# Altium PCB V1.1.PcbDoc
Units mil, origin at the board's own origin, x right, y up, seen from the top; angles counter-clockwise.
Board outline 29635 x 12600 mil, 2 copper layers (Top Layer, Bottom Layer); 166 components, 136 nets, 533 pads, 15 vias.
Unrouted connection lines stored in the file: 302.
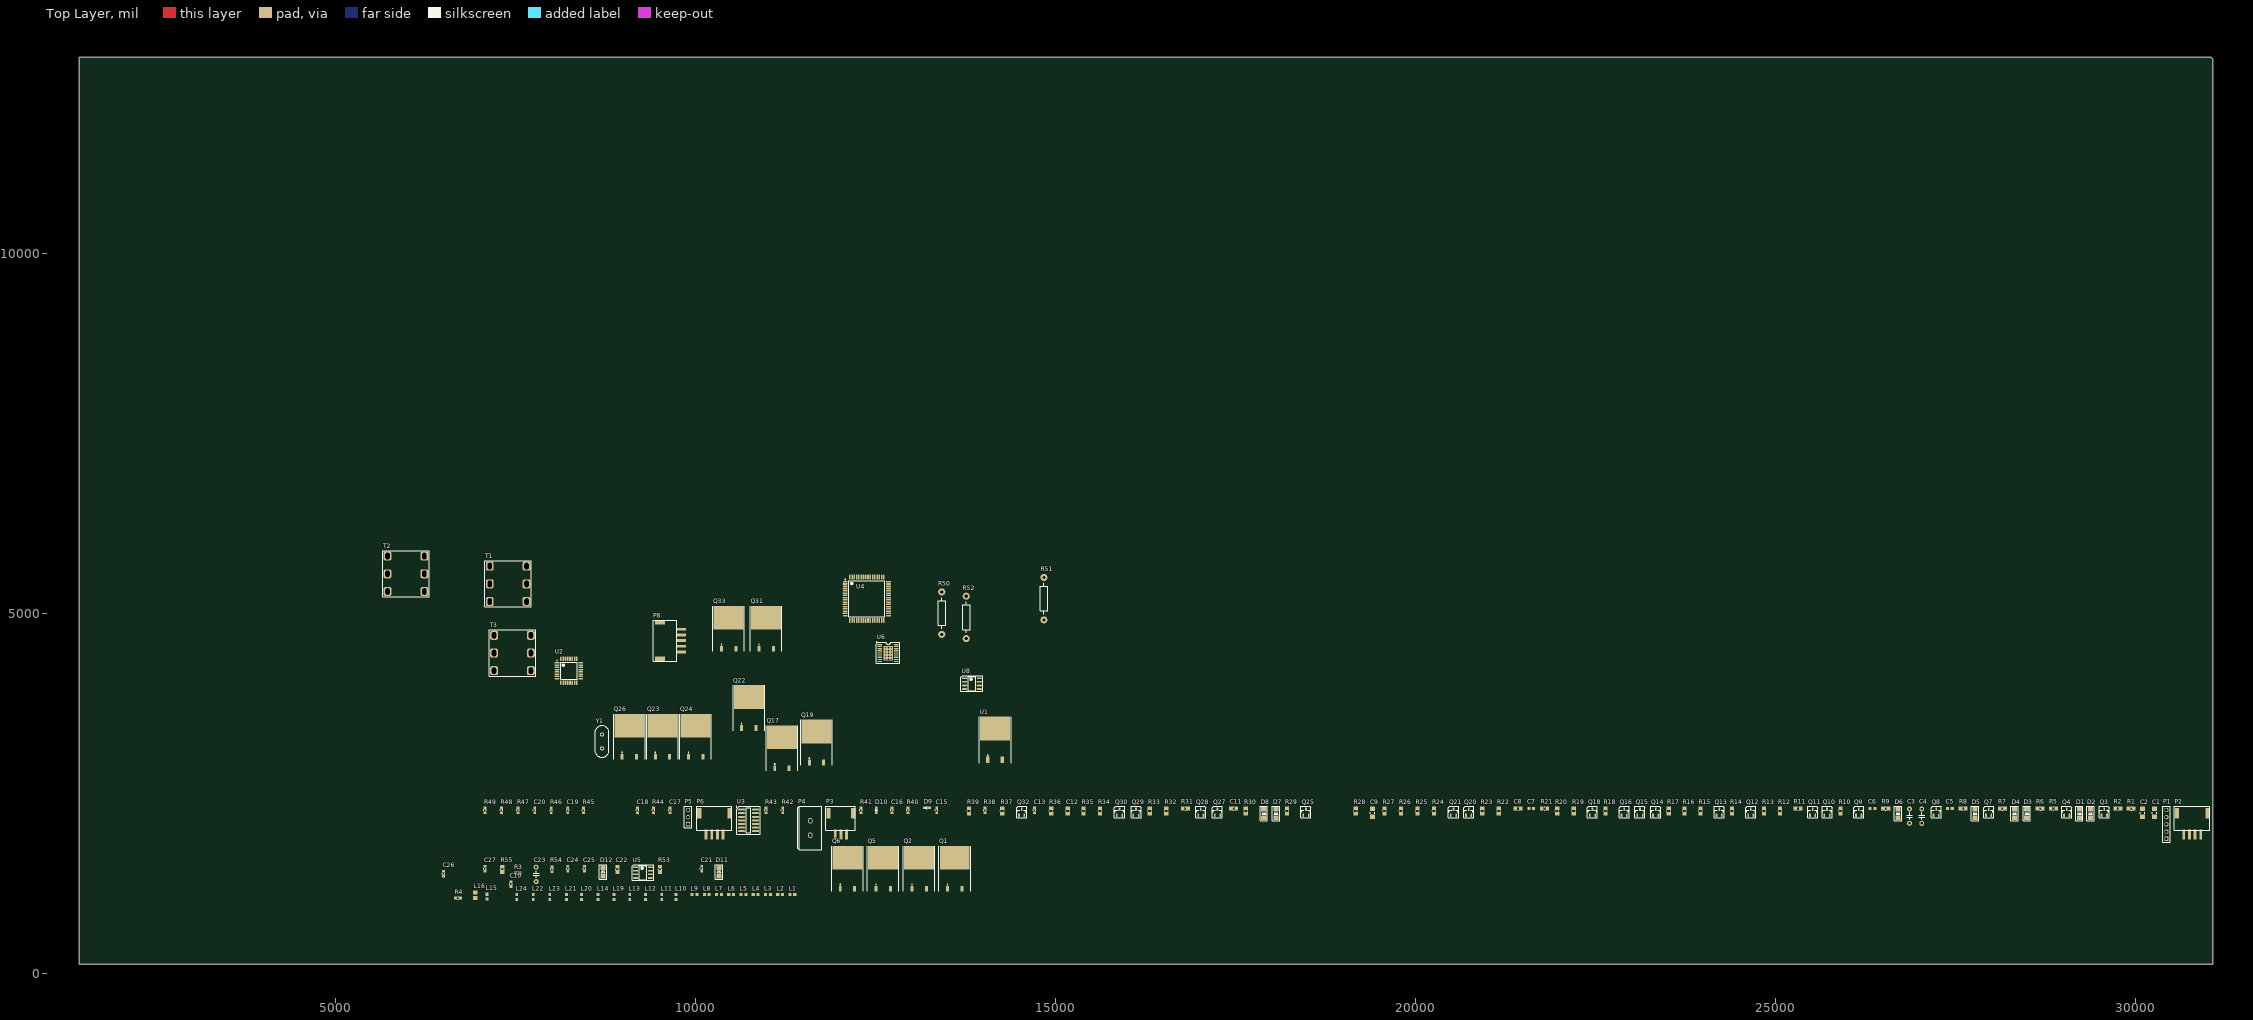
[diagram p0: Top Layer view]
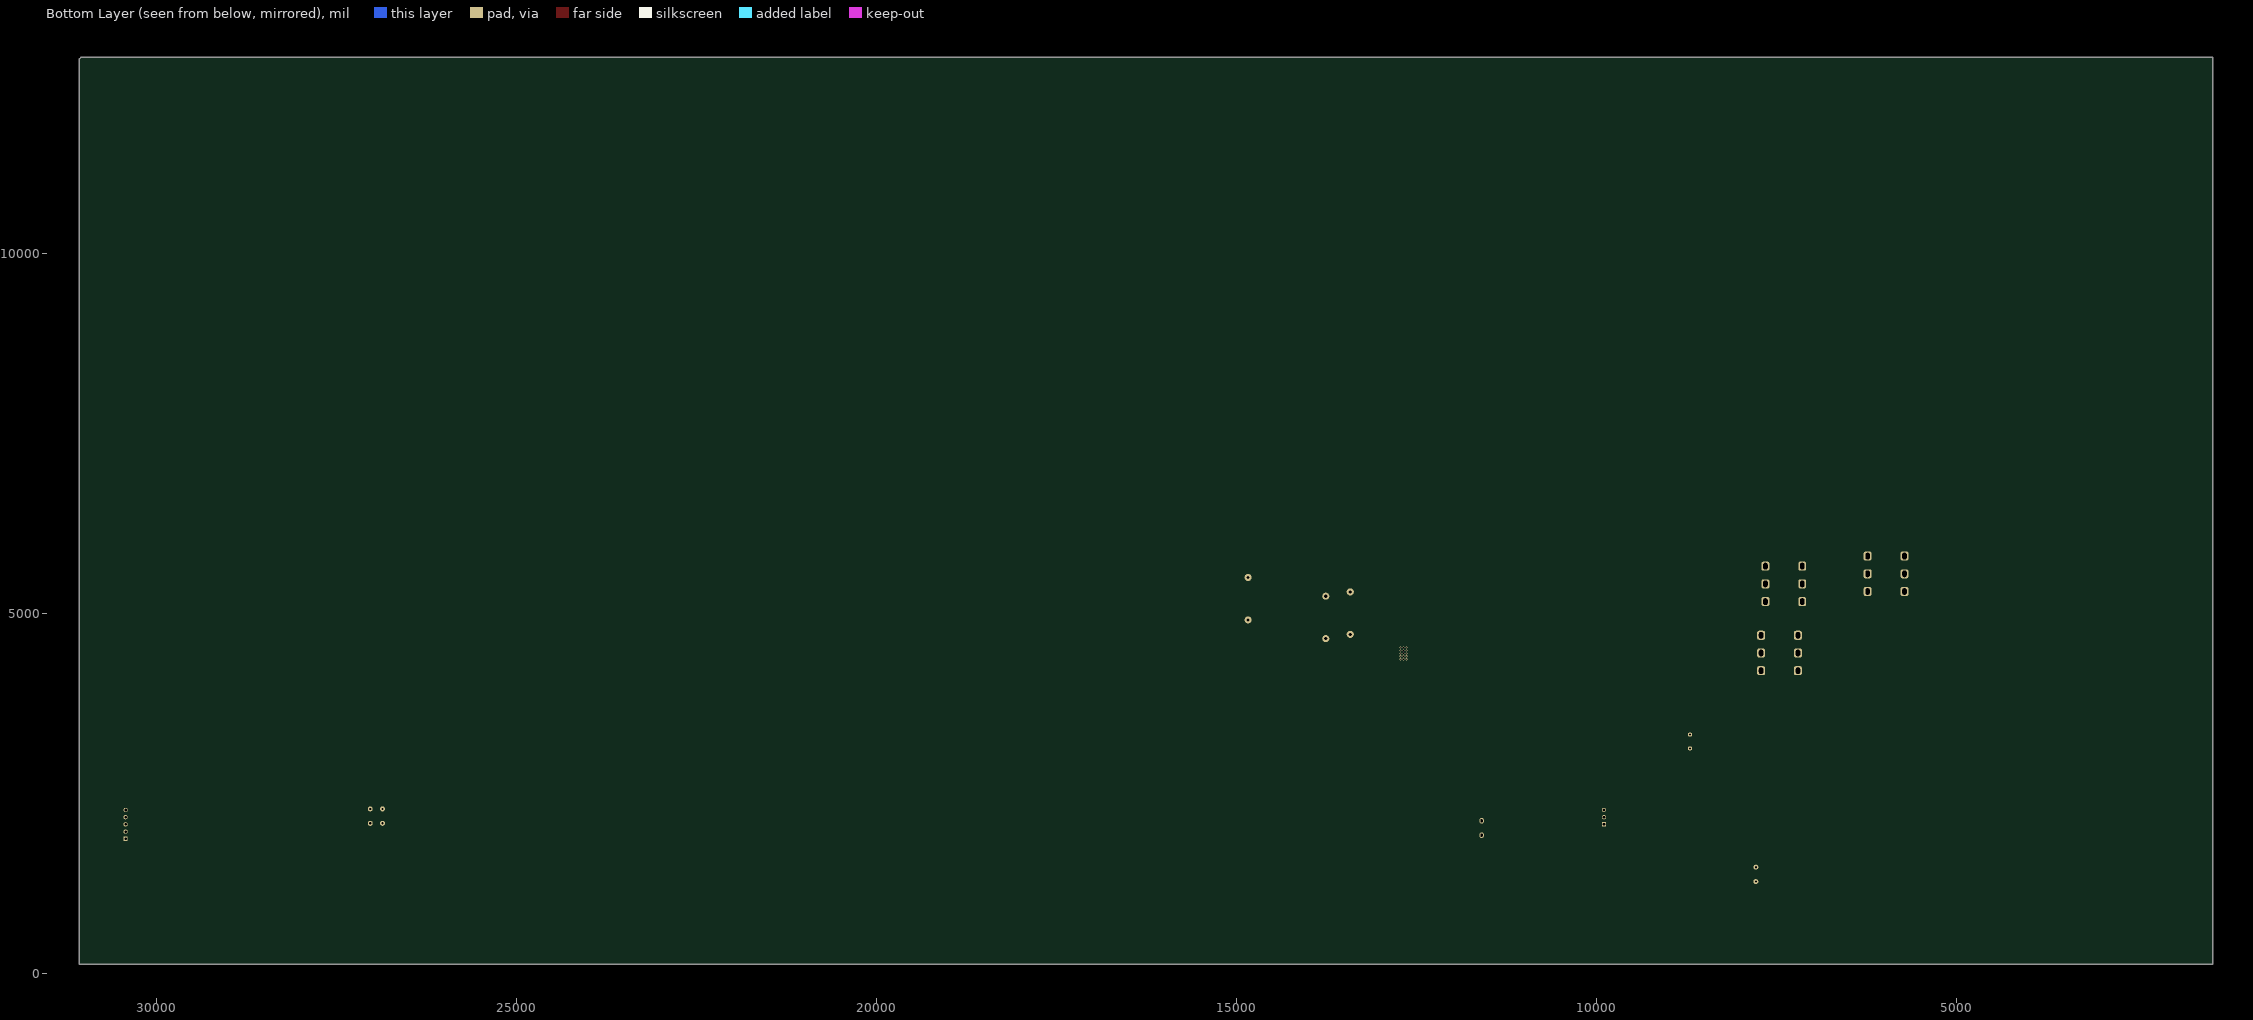
[diagram p1: Bottom Layer view, seen from below]

## Layer stack, top to bottom
Top Layer: signal copper 1.4
Dielectric: dielectric 12.6, FR-4, Dk 4.8
Bottom Layer: signal copper 1.4

## Board outline
1440,12720 31055,12720 31075,12700 31075,120 1440,120

## Design rules (kind name [scope] priority, off if disabled: settings)
Clearance [All] p1: gap=10
ComponentClearance [All] p1: gap=10 collisioncheckmode=3 verticalgap=10
PolygonConnect [All] p1: connectstyle=Relief reliefconductorwidth=10 reliefentries=4 polygonreliefangle="90 Angle"
RoutingVias [All] p1: holewidth=28 width=50 viastyle="Through Hole" minholewidth=28 minwidth=50 maxholewidth=28 maxwidth=50
SolderMaskExpansion [All] p1: expansion=4
TestPointUsage [All] p1: valid=0 allowmultiple=FALSE
Testpoint [All] p1: side=15 testpointundercomponent=TRUE minsize=40 maxsize=100 preferedsize=60 minholesize=0 maxholesize=40 preferedholesize=32 testpointgrid=1 style=1023 order=0123456789
Width [All] p1: maxlimit=10 minlimit=10 preferedwidth=10
18 further rules are at their usual default settings.

## Classes and differential pairs
component class core: L1 L2 L3 L4 L5 L6 L7 L8 L9 L10 L11 L12 L13 L14 L15 L16 L19 L20 L21 L22 L23 L24
component class driver: C1 C2 C3 C4 C5 C6 C7 C8 C9 C10 C11 C12 C13 C15 C16 C17 C18 C19 C20 D1 D2 D3 D4 D5 D6 D7 D8 D9 D10 P1 P2 P3 P4 P5 P6 P8 Q1 Q2 Q3 Q4 Q5 Q6 Q7 Q8 Q9 Q10 Q11 Q12 Q13 Q14 Q15 Q16 Q17 Q18 Q19 Q20 Q21 Q22 Q23 Q24 Q25 Q26 Q27 Q28 Q29 Q30 Q31 Q32 Q33 R1 R2 R3 R4 R5 R6 R7 R8 R9 R10 R11 R12 R13 R14 R15 R16 R17 R18 R19 R20 R21 R22 R23 R24 R25 R26 R27 R28 R29 R30 R31 R32 R33 R34 R35 R36 R37 R38 R39 R40 R41 R42 R43 R44 R45 R46 R47 R48 R49 T1 T2 T3 U2 U3 U8 Y1
component class power: C21 C22 C23 C24 C25 C26 C27 D11 D12 R50 R51 R52 R53 R54 R55 U1 U4 U5 U6

## Components (designator, comment, footprint, x,y, rotation, side; value= is the part's Value field where it differs from the comment)
C1 "Cap" 3216[1206] 30270,2225 r90 top
C2 "Cap" 3216[1206] 30100,2225 r90 top
C3 "Cap" C-5.08 26865,2080 r90 top
C4 "Cap" C-5.08 27035,2080 r90 top
C5 "Cap" 1608[0603] 27425,2285 r0 top
C6 "Cap" 1608[0603] 26350,2285 r0 top
C7 "Cap" 1608[0603] 21610,2285 r0 top
C8 "Cap" R0805 21425,2285 r0 top
C9 "Cap" 3216[1206] 19405,2225 r90 top
C10 "Cap" 0603 7435,1235 r90 top
C11 "Cap" R0805 17475,2285 r0 top
C12 "Cap" R0805 15170,2250 r90 top
C13 "Cap" 0603 14710,2260 r90 top
C15 "Cap" 0603 13350,2260 r90 top
C16 "Cap" 0603 12730,2260 r90 top
C17 "Cap" 0603 9645,2260 r90 top
C18 "Cap" 0603 9195,2260 r90 top
C19 "Cap" 0603 8225,2260 r90 top
C20 "Cap" 0603 7765,2260 r90 top
C21 "Cap" 0603 10085,1450 r90 top
C22 "Cap" R0805 8915,1440 r90 top
C23 "Cap" C-5.08 7785,1270 r90 top
C24 "Cap" 0603 8225,1450 r90 top
C25 "Cap" 0603 8455,1450 r90 top
C26 "Cap" 0603 6500,1380 r90 top
C27 "Cap" 0603 7075,1450 r90 top
D1 "Diode" LL34 29225,2215 r90 top
D2 "Diode" LL34 29380,2215 r90 top
D3 "Diode" LL34 28495,2215 r90 top
D4 "Diode" LL34 28325,2215 r90 top
D5 "Zener diode" LL34 27775,2215 r90 top
D6 "Zener diode" LL34 26705,2215 r90 top
D7 "Diode" LL34 18065,2215 r90 top
D8 "Zener diode" LL34 17895,2215 r90 top
D9 "WORK" 0603-LED 13215,2295 r0 top
D10 "FALT" 0603-LED 12510,2260 r90 top
D11 "4148" LL34 10325,1405 r90 top
D12 "4148" LL34 8715,1405 r90 top
L1 "Inductor" 1608[0603] 11345,1090 r0 top
L2 "Inductor" 1608[0603] 11175,1090 r0 top
L3 "Inductor" 1608[0603] 11005,1090 r0 top
L4 "Inductor" 1608[0603] 10835,1090 r0 top
L5 "Inductor" 1608[0603] 10665,1090 r0 top
L6 "Inductor" 1608[0603] 10495,1090 r0 top
L7 "Inductor" 1608[0603] 10325,1090 r0 top
L8 "Inductor" 1608[0603] 10155,1090 r0 top
L9 "Inductor" 1608[0603] 9985,1090 r0 top
L10 "Inductor" 1608[0603] 9730,1055 r90 top
L11 "Inductor" 1608[0603] 9530,1055 r90 top
L12 "Inductor" 1608[0603] 9305,1055 r90 top
L13 "Inductor" 1608[0603] 9085,1055 r90 top
L14 "Inductor" 1608[0603] 8645,1055 r90 top
L15 "Inductor" 1608[0603] 7100,1060 r90 top
L16 "Inductor" 2012[0805] 6940,1080 r90 top
L19 "Inductor" 1608[0603] 8865,1055 r90 top
L20 "Inductor" 1608[0603] 8415,1055 r90 top
L21 "Inductor" 1608[0603] 8205,1055 r90 top
L22 "Inductor" 1608[0603] 7745,1055 r90 top
L23 "Inductor" 1608[0603] 7975,1055 r90 top
L24 "Inductor" 1608[0603] 7515,1055 r90 top
P1 "PROG" HDR1X5 30435,1865 r90 top
P2 "ENC" HY2.0-4P 30675,1925 r0 top
P3 "IIC" HY2.0-3P 11940,1925 r0 top
P4 "POW" KF127-5.08-2P 11595,1915 r90 top
P5 "TTL" HDR1X3 9895,2065 r90 top
P6 "CTL" HY2.0-4P 10145,1925 r0 top
P8 "HALL" HY2.0-5P 9800,4460 r90 top
Q1 "CSD19536" D2PAK#1 13600,1385 r0 top
Q2 "CSD19536" D2PAK#1 13105,1385 r0 top
Q3 "PNP" SOT-23-PNP 29570,2235 r0 top
Q4 "PNP" SOT-23-PNP 29050,2235 r0 top
Q5 "CSD19536" D2PAK#1 12605,1385 r0 top
Q6 "CSD19536" D2PAK#1 12110,1385 r0 top
Q7 "NPN" SOT-23-NPN 27965,2235 r0 top
Q8 "NPN" SOT-23-NPN 27235,2235 r0 top
Q9 "NPN" SOT-23-NPN 26160,2235 r0 top
Q10 "PNP" SOT-23-PNP 25720,2235 r0 top
Q11 "PNP" SOT-23-PNP 25520,2235 r0 top
Q12 "NPN" SOT-23-NPN 24660,2235 r0 top
Q13 "PNP" SOT-23-PNP 24220,2235 r0 top
Q14 "PNP" SOT-23-PNP 23340,2235 r0 top
Q15 "PNP" SOT-23-PNP 23120,2235 r0 top
Q16 "NPN" SOT-23-NPN 22900,2235 r0 top
Q17 "CSD19536" D2PAK#1 11200,3060 r0 top
Q18 "NPN" SOT-23-NPN 22460,2235 r0 top
Q19 "CSD19536" D2PAK#1 11680,3140 r0 top
Q20 "NPN" SOT-23-NPN 20740,2235 r0 top
Q21 "NPN" SOT-23-NPN 20530,2235 r0 top
Q22 "CSD19536" D2PAK#1 10740,3620 r0 top
Q23 "CSD19536" D2PAK#1 9540,3220 r0 top
Q24 "CSD19536" D2PAK#1 10000,3220 r0 top
Q25 "PNP" SOT-23-PNP 18480,2235 r0 top
Q26 "CSD19536" D2PAK#1 9080,3220 r0 top
Q27 "NPN" SOT-23-NPN 17250,2235 r0 top
Q28 "PNP" SOT-23-PNP 17020,2235 r0 top
Q29 "PNP" SOT-23-PNP 16120,2235 r0 top
Q30 "NPN" SOT-23-NPN 15890,2235 r0 top
Q31 "CSD19536" D2PAK#1 10980,4720 r0 top
Q32 "NPN" SOT-23-NPN 14530,2235 r0 top
Q33 "CSD19536" D2PAK#1 10460,4720 r0 top
R1 "Res1" R0805 29945,2285 r0 top
R2 "Res1" R0805 29760,2285 r0 top
R3 "Res1" 0603 7530,1390 r0 top
R4 "Res1" 0603 6700,1040 r0 top
R5 "Res1" R0805 28865,2285 r0 top
R6 "Res1" R0805 28680,2285 r0 top
R7 "Res1" R0805 28155,2285 r0 top
R8 "Res1" R0805 27610,2285 r0 top
R9 "Res1" R0805 26535,2285 r0 top
R10 "Res1" R0805 25905,2250 r90 top
R11 "Res1" R0805 25315,2285 r0 top
R12 "Res1" R0805 25065,2250 r90 top
R13 "Res1" R0805 24845,2250 r90 top
R14 "Res1" R0805 24400,2250 r90 top
R15 "Res1" R0805 23960,2250 r90 top
R16 "Res1" R0805 23740,2250 r90 top
R17 "Res1" R0805 23520,2250 r90 top
R18 "Res1" R0805 22640,2250 r90 top
R19 "Res1" R0805 22200,2250 r90 top
R20 "Res1" R0805 21970,2250 r90 top
R21 "Res1" R0805 21795,2285 r0 top
R22 "Res1" R0805 21160,2250 r90 top
R23 "Res1" R0805 20930,2250 r90 top
R24 "Res1" R0805 20260,2250 r90 top
R25 "Res1" R0805 20030,2250 r90 top
R26 "Res1" R0805 19800,2250 r90 top
R27 "Res1" R0805 19570,2250 r90 top
R28 "Res1" R0805 19170,2250 r90 top
R29 "Res1" R0805 18215,2250 r90 top
R30 "Res1" R0805 17645,2250 r90 top
R31 "Res1" R0805 16805,2285 r0 top
R32 "Res1" R0805 16540,2250 r90 top
R33 "Res1" R0805 16310,2250 r90 top
R34 "Res1" R0805 15620,2250 r90 top
R35 "Res1" R0805 15390,2250 r90 top
R36 "Res1" R0805 14940,2250 r90 top
R37 "Res1" R0805 14260,2250 r90 top
R38 "Res1" 0603 14020,2260 r90 top
R39 "Res1" R0805 13800,2250 r90 top
R40 "Res1" 0603 12950,2260 r90 top
R41 "Res1" 0603 12300,2260 r90 top
R42 "Res1" 0603 11210,2260 r90 top
R43 "Res1" 0603 10980,2260 r90 top
R44 "Res Semi" 0603 9415,2260 r90 top
R45 "Res Semi" 0603 8445,2260 r90 top
R46 "Res Semi" 0603 7995,2260 r90 top
R47 "Res Semi" 0603 7535,2260 r90 top
R48 "Res Semi" 0603 7305,2260 r90 top
R49 "Res Semi" 0603 7075,2260 r90 top
R50 "" R15-1mm 13420,4800 r90 top
R51 "" R15-1mm 14840,5000 r90 top
R52 "" R15-1mm 13760,4740 r90 top
R53 "Res1" R0805 9505,1440 r90 top
R54 "Res1" 0603 8005,1440 r90 top
R55 "Res1" R0805 7315,1440 r90 top
T1 "M5" M5 7140,5160 r0 top
T2 "M5" M5 5720,5300 r0 top
T3 "M5" M5 7200,4200 r0 top
U1 "L7805ACD2T-TR" D2PAK#2 14160,3180 r0 top
U2 "ATmega8-16AC" 32A_N 8240,4200 r0 top
U3 "MC74HC14AD" 751A 10735,2120 r0 top
U4 "LM358D" 64A_N 12380,5200 r0 top
U5 "MAX4080T" SOIC8 9270,1395 r0 top
U6 "LM5576" HTTSOP-20 12560,4560 r0 top
U8 "MAX706RCSA" SOIC8 13840,4020 r0 top
Y1 "XTAL" 49SD 8700,3120 r90 top

## Footprints (in the part's own frame and the unit in brackets; to place one, negate y for a bottom-side part, rotate by r counter-clockwise, add the part's x,y. Pads: shape width x height; smd on the part's side, far side on the other; paste and mask are expansions set on the pad)
32A_N [mm] "32-Pin Thin Quad Flat Pack 0.8 mm Pitch, IPC Medium Density"
  oval 1.65x0.55 smd: 1(-4.2,2.8) 2(-4.2,2) 3(-4.2,1.2) 4(-4.2,0.4) 5(-4.2,-0.4) 6(-4.2,-1.2) 7(-4.2,-2) 8(-4.2,-2.8) 17(4.2,-2.8) 18(4.2,-2) 19(4.2,-1.2) 20(4.2,-0.4) 21(4.2,0.4) 22(4.2,1.2) 23(4.2,2) 24(4.2,2.8)
  oval 0.55x1.65 smd: 9(-2.8,-4.2) 10(-2,-4.2) 11(-1.2,-4.2) 12(-0.4,-4.2) 13(0.4,-4.2) 14(1.2,-4.2) 15(2,-4.2) 16(2.8,-4.2) 25(2.8,4.2) 26(2,4.2) 27(1.2,4.2) 28(0.4,4.2) 29(-0.4,4.2) 30(-1.2,4.2) 31(-2,4.2) 32(-2.8,4.2)
  silkscreen extent -4.32,-2.95 2.95,3.75, body extent -3.5,-3.5 3.5,3.5, height 1.2
49SD [mil]
  round 60 hole 30: 1(0,0) 2(193,0)
  silkscreen extent -124,-95 315,94
64A_N [mm] "64-Pin Thin Quad Flat Pack 0.8 mm Pitch, IPC Medium Density"
  oval 1.75x0.55 smd: 1(-7.65,6) 2(-7.65,5.2) 3(-7.65,4.4) 4(-7.65,3.6) 5(-7.65,2.8) 6(-7.65,2) 7(-7.65,1.2) 8(-7.65,0.4) 9(-7.65,-0.4) 10(-7.65,-1.2) 11(-7.65,-2) 12(-7.65,-2.8) 13(-7.65,-3.6) 14(-7.65,-4.4) 15(-7.65,-5.2) 16(-7.65,-6) 33(7.65,-6) 34(7.65,-5.2) 35(7.65,-4.4) 36(7.65,-3.6) 37(7.65,-2.8) 38(7.65,-2) 39(7.65,-1.2) 40(7.65,-0.4) 41(7.65,0.4) 42(7.65,1.2) 43(7.65,2) 44(7.65,2.8) 45(7.65,3.6) 46(7.65,4.4) 47(7.65,5.2) 48(7.65,6)
  oval 0.55x1.75 smd: 17(-6,-7.65) 18(-5.2,-7.65) 19(-4.4,-7.65) 20(-3.6,-7.65) 21(-2.8,-7.65) 22(-2,-7.65) 23(-1.2,-7.65) 24(-0.4,-7.65) 25(0.4,-7.65) 26(1.2,-7.65) 27(2,-7.65) 28(2.8,-7.65) 29(3.6,-7.65) 30(4.4,-7.65) 31(5.2,-7.65) 32(6,-7.65) 49(6,7.65) 50(5.2,7.65) 51(4.4,7.65) 52(3.6,7.65) 53(2.8,7.65) 54(2,7.65) 55(1.2,7.65) 56(0.4,7.65) 57(-0.4,7.65) 58(-1.2,7.65) 59(-2,7.65) 60(-2.8,7.65) 61(-3.6,7.65) 62(-4.4,7.65) 63(-5.2,7.65) 64(-6,7.65)
  silkscreen extent -7.77,-6.35 6.35,6.95, body extent -7,-7 7,7, height 1.2
0603 [mm]
  rect 1x1 smd: 1(-0.864,0) 2(0.864,0)
  silkscreen extent -0.18,-0.43 0.18,0.43
0603-LED [mm]
  rect 1x1 smd: 1(-0.864,0) 2(0.864,0)
  silkscreen extent -0.18,-0.51 0.18,0.56
751A [mm]
  oval 2.5x0.7 smd: 1(-2.45,3.81) 2(-2.45,2.54) 3(-2.45,1.27) 4(-2.45,0) 5(-2.45,-1.27) 6(-2.45,-2.54) 7(-2.45,-3.81) 8(2.45,-3.81) 9(2.45,-2.54) 10(2.45,-1.27) 11(2.45,0) 12(2.45,1.27) 13(2.45,2.54) 14(2.45,3.81)
  silkscreen extent -4.31,-4.83 4.19,4.95, body extent -2,-4.38 2,4.38, height 1.75
1608[0603] [mm] "Chip Capacitor; Body 1.6 x 0.8 mm (LxW typ)"
  rect 1.1x1 smd: 1(-0.85,0) 2(0.85,0)
2012[0805] [mm] "Chip Resistor; Body 2.0 x 1.3 mm (LxW typ)"
  rect 1.3x1.5 smd: 1(-0.95,0) 2(0.95,0)
3216[1206] [mm] "Chip Resistor; Body 3.2 x 1.6 mm (LxW typ)"
  rect 1.6x1.8 smd: 1(-1.4,0) 2(1.4,0)
  silkscreen extent -0.3,-0.8 0.3,0.8
C-5.08 [mm]
  round 1.75 hole 0.75: 1(0,0) 2(5.08,0)
  silkscreen extent 1.27,-1.02 3.81,1.02
D2PAK#1 [mm] "D2-PAK/TO-263-AB; 3 Leads (1 Cropped); Body 15.5 (inc. leads) x 10.5 mm (LxW max)"
  rect 1.05x2 smd: 1(-2.54,-5.5) 3(2.54,-5.5)
  rect 10.55x8.4 smd: 2(0,5.5)
  silkscreen extent -5.58,-6.4 5.58,9.6
D2PAK#2 [mm] "D2-PAK/TO-263-AB; 3 Leads (1 Cropped); Body 15.5 (inc. leads) x 10.5 mm (LxW max)"
  rect 1.143x2.235 smd: 1(-2.54,-5.5) 3(2.54,-5.5)
  rect 10.55x8.4 smd: 2(0,5.5)
  silkscreen extent -5.59,-6.73 5.59,9.6
HDR1X3 [mm] "Connector; Header; 3 Position"
  rect 1.5x1.5 hole 0.9: 1(0,0)
  round 1.5 hole 0.9: 2(2.54,0) 3(5.08,0)
  silkscreen extent -1.27,-1.27 6.35,1.27
HDR1X5 [mm] "Connector; Header; 5 Position"
  rect 1.5x1.5 hole 0.9: 1(0,0)
  round 1.5 hole 0.9: 2(2.54,0) 3(5.08,0) 4(7.62,0) 5(10.16,0)
  silkscreen extent -1.27,-1.27 11.43,1.27
HTTSOP-20 [mm]
  oval 1.65x0.4 smd: 1(0,0) 2(0,-0.65) 3(0,-1.3) 4(0,-1.95) 5(0,-2.6) 6(0,-3.25) 7(0,-3.9) 8(0,-4.55) 9(0,-5.2) 10(0,-5.85) 11(5.842,-5.85) 12(5.842,-5.2) 13(5.842,-4.55) 14(5.842,-3.9) 15(5.842,-3.25) 16(5.842,-2.6) 17(5.842,-1.95) 18(5.842,-1.3) 19(5.842,-0.65) 20(5.842,0)
  rect 3.3x5.08 smd: 17(2.921,-3)
  silkscreen extent -1.32,-6.5 7.07,1.14, body extent 0.64,-6.2 5.08,0.28, height 2.65
HY2.0-3P [mm]
  rect 1.5x3.6 smd: 0(-2.413,7.493) 0(6.369,7.493)
  rect 1x3.4 smd: 1(0,0) 2(2,0) 3(4,0)
  silkscreen extent -3.3,1.52 7.11,9.91
HY2.0-4P [mm]
  rect 1.5x3.6 smd: 0(-2.413,7.493) 0(8.369,7.493)
  rect 1x3.4 smd: 1(0,0) 2(2,0) 3(4,0) 4(6,0)
  silkscreen extent -3.3,1.52 9.14,9.91
HY2.0-5P [mm]
  rect 1.5x3.6 smd: 0(-2.413,7.493) 0(10.369,7.493)
  rect 1x3.4 smd: 1(0,0) 2(2,0) 3(4,0) 4(6,0) 5(8,0)
  silkscreen extent -3.3,1.52 11.18,9.91
KF127-5.08-2P [mm]
  oval 2x1.6 hole 0.625 slot 1.15 at 0 deg: 1(0,0) 2(5.08,0)
  silkscreen extent -5.08,-4 10.16,4.45
LL34 [mm] "MELF Diode, 2-Leads, Body 3.3x1.6mm, IPC Medium Density"
  rect 1.575x1.85 smd: 1(-1.5,0) 2(1.5,0)
  silkscreen extent -2.54,-1.27 2.54,1.27, body extent -1.65,-0.82 1.65,0.82, height 1.65
M5 [mm]
  rrect50% 2.8x3.2 hole 1.5 slot 2.3 at 90 deg: 1(0,0) 1(0,6.25) 1(0,12.5) 1(13,0) 1(13,6.25) 1(13,12.5)
  silkscreen extent -1.75,-1.91 14.71,14.4
R15-1mm [mm]
  round 2.5 hole 1.1: 1(-2.413,0) 2(12.573,0)
  silkscreen extent -0.38,-1.4 10.55,1.3
R0805 [mm] "Chip Resistor, 2-Leads, Body 2.0x1.3mm, IPC Medium Density"
  rect 1.298x1.501 smd: 1(-0.95,0) 2(0.95,0)
  silkscreen extent -0.13,-0.64 0.13,0.64
SOIC8 [mm]
  oval 1.8x0.6 smd: 1(-2.625,1.905) 2(-2.625,0.635) 3(-2.625,-0.635) 4(-2.625,-1.905) 5(2.575,-1.905) 6(2.575,-0.635) 7(2.575,0.635) 8(2.575,1.905)
  silkscreen extent -3.89,-2.74 3.84,2.77, body extent -2.03,-2.5 1.97,2.5, height 1.76
SOT-23-NPN [mm]
  rect 0.6x1.2 smd: 1(0.95,-1.15) 2(-0.95,-1.15) 3(0,1.067)
  silkscreen extent -1.78,-2.03 1.78,2.03, body extent -1.5,-0.7 1.5,0.7, height 1.1
SOT-23-PNP [mm]
  rect 0.6x1.2 smd: 1(0.95,-1.15) 2(-0.95,-1.15) 3(0,1.067)
  silkscreen extent -1.78,-2.03 1.78,2.03, body extent -1.5,-0.7 1.5,0.7, height 1.1

## Part data
C1 C2 C3 C4 C5 C6 C7 C8 C9 C10 C11 C12 C13 C15 C16 C17 C18 C19 C20 C21 C22 C23 C24 C25 C26 C27: "Capacitor"
D1 D2 D3 D4 D7 D11 D12: library part "Diode 1N5408", "3 Amp Medium Power Silicon Rectifier Diode"
D5 D6 D8: library part "D Zener", "Zener Diode"
D9 D10: library part LED2, "Typical RED, GREEN, YELLOW, AMBER GaAs LED"
P1 P8: library part "Header 5", "Header, 5-Pin"
P2 P6: library part "Header 4", "Header, 4-Pin"
P3 P5: library part "Header 3", "Header, 3-Pin"
P4: library part "Header 2", "Header, 2-Pin"
Q1 Q2 Q5 Q6 Q17 Q19 Q22 Q23 Q24 Q26 Q31 Q33: library part IRF644S, "HEXFET N-Channel Power MOSFET"
Q3 Q4 Q10 Q11 Q13 Q14 Q15 Q25 Q28 Q29: library part 2N5401, "PNP General Purpose Amplifier"
Q7 Q8 Q9 Q12 Q16 Q18 Q20 Q21 Q27 Q30 Q32: library part 2N5551, "NPN General Purpose Amplifier"
R1 R2 R3 R4 R5 R6 R7 R8 R9 R10 R11 R12 R13 R14 R15 R16 R17 R18 R19 R20 R21 R22 R23 R24 R25 R26 R27 R28 R29 R30 R31 R32 R33 R34 R35 R36 R37 R38 R39 R40 R41 R42 R43 R53 R54 R55: "Resistor"
R44 R45 R46 R47 R48 R49: "Semiconductor Resistor"
R50 R51 R52: library part Res1, "Resistor"
U1: library part MC78M05ACDTRK, "Three-Terminal Medium Current Positive Voltage Regulator"
U2: "8-Bit AVR Microcontroller with 8K Bytes of In-System Programmable Flash Memory"
U3: "Hex Schmitt-Trigger Inverter"
U4: "Dual Low-Power Operational Amplifier"
U5: library part MAX4080
U8: "+3V Voltage Monitoring, Low-Cost, µP Supervisory Circuit"
Y1: "Crystal Oscillator"

## Via types
v1: diameter 30, hole 22, Top Layer to Bottom Layer, tented top, 15 vias

## Nets (pads, with @x,y where several pads share a name; then routed paths per layer and width w, separated by ;. In a path a pad name is that pad's centre, name@x,y a point inside that pad or via, vN(x,y) a via of type N, cw(c..) or ccw(c..) an arc to the next point about the centre after c; other vN are vias at no path point)
+5V: C10.2 C17.1 C21.2 D11.2 L16.2 P2.2 P8.1 Q16.2 Q18.2 Q30.2 R3.1 R4.1 R8.2 R9.2 R10.2 R30.2 R38.2 R40.2 R42.1 R43.1 R44.2 R45.2 R46.2 U1.3 U2.4 U2.6 U2.18 U4.8 U8.2
+12V: Q7.3 Q14.1 Q15.1 Q29.1 R7.2 R15.1 R16.1 R33.1 U1.1
A: D5.1 Q1.3 Q5.3 Q10.3 Q17.2 Q22.2 R11.1 T1.1
B: D6.1 Q2.3 Q6.3 Q11.3 Q19.2 Q23.2 R12.1 T2.1
BRK: P1.3 P6.2 U2.17
BT_PWM: R17.1 U2.1
C: C11.2 D8.1 Q24.3 Q26.3 Q28.3 Q31.2 Q33.2 R31.1 T3.1
CSA: C26.2 U2.22 U4.6 U4.7
DGND: C5.1 C6.1 C7.2
DIR: P1.2 P6.3 U2.16
FALT: R41.2 U2.26
GND: C1.2 C2.2 C4.2 C8.1 C9.2 C10.1 C12.1 C13.2 C15.2 C17.2 C18.1 C19.1 C20.1 C21.1 C22.1 C23.2 C24.2 C25.1 C26.1 C27.1 D9.2 D10.2 D12.1 P1.4 P2.1 P3.1 P4.1 P5.1 P6.1 P8.5 Q13.3 Q17.3 Q19.3 Q20.1 Q21.1 Q22.3 Q23.3 Q31.3 Q32.1 Q33.3 R55.1 U1.2 U2.3 U2.21 U3.7 U4.4 U5.4 U8.3
HA: U2.23 U3.12
HB: U2.24 U3.8
HC: U2.25 U3.4
K1: L22.1
K2: L21.1
K3: L20.1
K4: L19.1
M8_DOG: U8.6
M8_RST: P1.5 U2.29 U8.7
NetC3_1: C3.1 D1.2 D2.1
NetC3_2: C3.2 Q7.1 Q13.1
NetC5_1: D5.2 Q1.1 Q5.1 Q10.1 R5.2
NetC5_2: C5.2 L16.1
NetC6_1: D6.2 Q2.1 Q6.1 Q11.1 R6.2
NetC6_2: C6.2 Y1.1
NetC7_1: C7.1 Y1.2
NetC7_2: Q20.3 R18.2 R20.2 R26.2
NetC8_2: C8.2 Q21.3 R19.2 R21.2 R27.2
NetC11_1: C11.1 D8.2 Q24.1 Q26.1 Q28.1 R29.2
NetC12_2: C12.2 Q32.3 R34.2 R35.2 R39.2
NetC13_1: C13.1 U2.7
NetC15_1: C15.1 U2.8
NetC16_1: C16.1 U2.20
NetC16_2: C16.2 U2.5
NetC18_2: C18.2 R47.1 U3.1
NetC19_2: C19.2 R48.1 U3.5
NetC20_2: C20.2 R49.1 U3.11
NetC24_1: C24.1 R53.1 R55.2 U4.3
NetC27_2: C27.2 R54.1 U4.5
NetD3_1: D3.1 Q3.3 Q10.2 R11.2
NetD3_2: D3.2 R5.1
NetD4_1: D4.1 Q4.3 Q11.2 R12.2
NetD4_2: D4.2 R6.1
NetD7_1: D7.1 Q25.3 Q28.2 R31.2
NetD7_2: D7.2 R29.1
NetD9_1: D9.1 R40.1
NetD10_1: D10.1 R41.1
NetL1_1: L1.1
NetL2_1: L2.1
NetL3_1: L3.1
NetL4_1: L4.1
NetL5_1: L5.1
NetL6_1: L6.1
NetL7_1: L7.1
NetL8_1: L8.1
NetL9_1: L9.1
NetL10_1: L10.1
NetL11_1: L11.1
NetL12_1: L12.1
NetL13_1: L13.1
NetL14_1: L14.1
NetL15_2: L15.2
NetL19_2: L19.2
NetL20_2: L20.2
NetL21_2: L21.2
NetL22_2: L22.2
NetL23_1: L23.1
NetL24_1: L24.1
NetP8_2: P8.2 R44.1 R47.2
NetP8_3: P8.3 R45.1 R48.2
NetP8_4: P8.4 R46.1 R49.2
NetQ3_2: Q3.2 Q8.3 R1.1
NetQ4_2: Q4.2 Q9.3 R2.1
NetQ7_2: Q7.2 Q12.3 Q13.2 R7.1
NetQ8_1: Q8.1 R13.2
NetQ8_2: Q8.2 R8.1
NetQ9_1: Q9.1 R14.2
NetQ9_2: Q9.2 R9.1
NetQ12_1: Q12.1 R17.2
NetQ12_2: Q12.2 R10.1
NetQ14_2: Q14.2 Q16.3 R15.2
NetQ14_3: Q14.3 R20.1
NetQ15_2: Q15.2 Q18.3 R16.2
NetQ15_3: Q15.3 R21.1
NetQ16_1: Q16.1 R22.2
NetQ17_1: Q17.1 R18.1
NetQ18_1: Q18.1 R23.2
NetQ19_1: Q19.1 R19.1
NetQ20_2: Q20.2 R24.1
NetQ21_2: Q21.2 R25.1
NetQ22_1: Q22.1 R26.1
NetQ23_1: Q23.1 R27.1
NetQ25_2: Q25.2 Q27.3 R28.1
NetQ27_1: Q27.1 R32.2
NetQ27_2: Q27.2 R30.1
NetQ29_2: Q29.2 Q30.3 R33.2
NetQ29_3: Q29.3 R35.1
NetQ30_1: Q30.1 R36.2
NetQ31_1: Q31.1 R34.1
NetQ32_2: Q32.2 R37.1
NetQ33_1: Q33.1 R39.1
NetR38_1: R38.1 U8.4
NetR54_2: R54.2 U5.5
NetU3_2: U3.2 U3.3
NetU3_6: U3.6 U3.9
NetU3_10: U3.10 U3.13
NetU8_1: U8.1 U8.8
PWM: P6.4 U2.12
QEA: P2.4 R4.2 U2.32
QEB: P2.3 R3.2 U2.2
RX: P5.2 U2.30
S1: L7.2
S2: L8.2
S3: L9.2
S4: L10.2
S5: L11.2
S6: L12.2
S7: L13.2
S8: L14.2
SCL: P3.2 R43.2 U2.28
SDA: P3.3 R42.2 U2.27
SIG: L15.1
STEUER_A+: R13.1 U2.11
STEUER_A-: R22.1 R24.2 U2.13
STEUER_B+: R14.1 U2.10
STEUER_B-: R23.1 R25.2 U2.14
STEUER_C+: R32.1 U2.9
STEUER_C-: P1.1 R36.1 R37.2 U2.15
TX: P5.3 U2.31
VCC: C22.2 C23.1 R50.2 R51.2 R52.2 R53.2 U5.1 U5.2
VDD: U3.14
VH: C4.1 D2.2 Q3.1 Q4.1 Q25.1 R1.2 R2.2 R28.2
VP: C1.1 C2.1 C9.1 D1.1 P4.2 Q1.2 Q2.2 Q5.2 Q6.2 Q24.2 Q26.2 R50.1 R51.1 R52.1 U5.8
VSA: C25.2 D11.1 D12.2 U2.19 U4.1 U4.2
pads on no net: L1.2 L2.2 L3.2 L4.2 L5.2 L6.2 L23.2 L24.2 P2.0 P3.0 P6.0 P8.0 U4.9 U4.10 U4.11 U4.12 U4.13 U4.14 U4.15 U4.16 U4.17 U4.18 U4.19 U4.20 U4.21 U4.22 U4.23 U4.24 U4.25 U4.26 U4.27 U4.28 U4.29 U4.30 U4.31 U4.32 U4.33 U4.34 U4.35 U4.36 U4.37 U4.38 U4.39 U4.40 U4.41 U4.42 U4.43 U4.44 U4.45 U4.46 U4.47 U4.48 U4.49 U4.50 U4.51 U4.52 U4.53 U4.54 U4.55 U4.56 U4.57 U4.58 U4.59 U4.60 U4.61 U4.62 U4.63 U4.64 U5.3 U5.6 U5.7 U6.1 U6.2 U6.3 U6.4 U6.5 U6.6 U6.7 U6.8 U6.9 U6.10 U6.11 U6.12 U6.13 U6.14 U6.15 U6.16 U6.17 U6.18 U6.19 U6.20 U8.5
copper on no net:
  other v1: 12640,4360 12680,4360 12720,4360 12640,4400 12680,4400 12720,4400 12640,4440 12680,4440 12720,4440 12640,4480 12680,4480 12720,4480 12640,4520 12680,4520 12720,4520